# EAGLE board Adapter-MSO-10 (EAGLE 5.06)
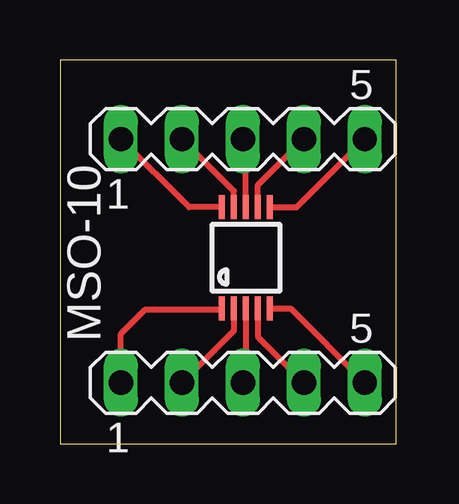
[diagram p0: board, top side]

Size 14 x 16 mm. Coordinates in mm from the lower left corner, seen from the top.
Outline: 0,0 14,0 14,16 0,16 0,0
Copper layers (1*16): Top 0.035mm / dielectric 1.5mm / Bottom 0.035mm
Design rules "PCB-POOL": minimum track width 6mil, minimum drill 12mil, track to track 6mil, track to pad 6mil, pad to pad 6mil, via to via 6mil, smd to smd 6mil, copper to edge 20mil, drill to drill 8mil, minimum pad ring 8mil, minimum via ring 6mil, stop-mask expansion 3mil, vias tented up to drill 0mil, thermal gap 8mil

## Footprints (pad centres in the part's own frame; a part is rotated, then mirrored left to right if it is on the bottom)
MSOP10 = smd 0.25 x 1: 1 -1,-2.113; 2 -0.5,-2.113; 3 0,-2.113; 4 0.5,-2.113; 5 1,-2.113; 6 1,2.113; 7 0.5,2.113; 8 0,2.113; 9 -0.5,2.113; 10 -1,2.113
MA05-1 = drill 1.016 long: 1 -5.08,0; 2 -2.54,0; 3 0,0; 4 2.54,0; 5 5.08,0

## Placement (x,y rotation side)
E$1  [MSOP10]  7.75,7.75 0 top
E$2  [MA05-1]  7.62,12.7 0 top
E$3  [MA05-1]  7.62,2.54 0 top

## Library data of the parts
E$1 = ref-packages
E$2 E$3 = con-lstb

## Nets
S$1: E$1.10 E$2.1
S$2: E$1.9 E$2.2
S$3: E$1.8 E$2.3
S$4: E$1.7 E$2.4
S$5: E$1.6 E$2.5
S$6: E$1.1 E$3.1
S$7: E$1.2 E$3.2
S$8: E$1.3 E$3.3
S$9: E$1.4 E$3.4
S$10: E$1.5 E$3.5

## Tracks (layer width: path | path; a pad name or v marks a point on that pad's centre or on a via)
S$1
  Top 0.254: E$1.10 5.38,9.86 E$2.1
S$2
  Top 0.254: E$1.9 7.25,10.53 E$2.2
S$3
  Top 0.254: E$1.8 7.75,12.57 E$2.3
S$4
  Top 0.254: E$1.7 8.25,10.79 E$2.4
S$5
  Top 0.254: E$1.6 9.86,9.86 E$2.5
S$6
  Top 0.254: E$3.1 2.54,4.57 3.56,5.59 6.7,5.59 E$1.1
S$7
  Top 0.254: E$1.2 7.25,4.71 E$3.2
S$8
  Top 0.254: E$1.3 7.75,2.67 E$3.3
S$9
  Top 0.254: E$1.4 8.25,4.45 E$3.4
S$10
  Top 0.254: E$1.5 9.61,5.63 E$3.5

## Text on the board
tPlace: MSO-10